# EAGLE board GPSClock (EAGLE 6.5.0)
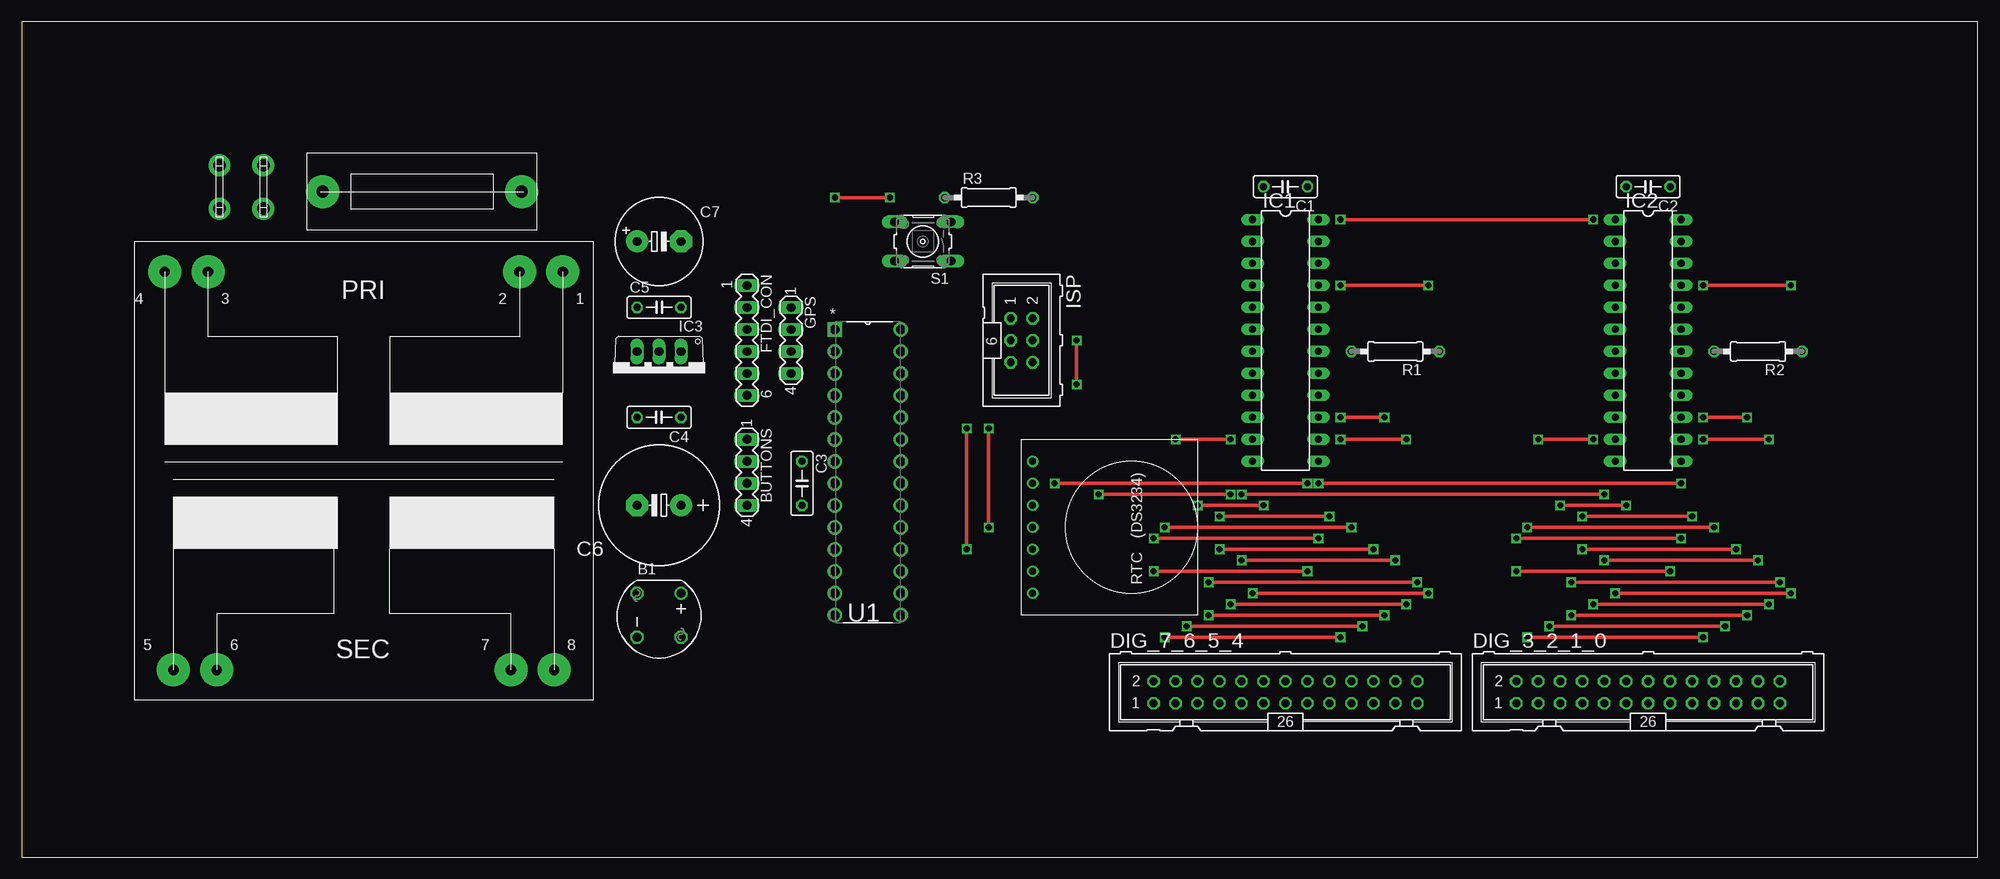
[diagram p0: board, top side]
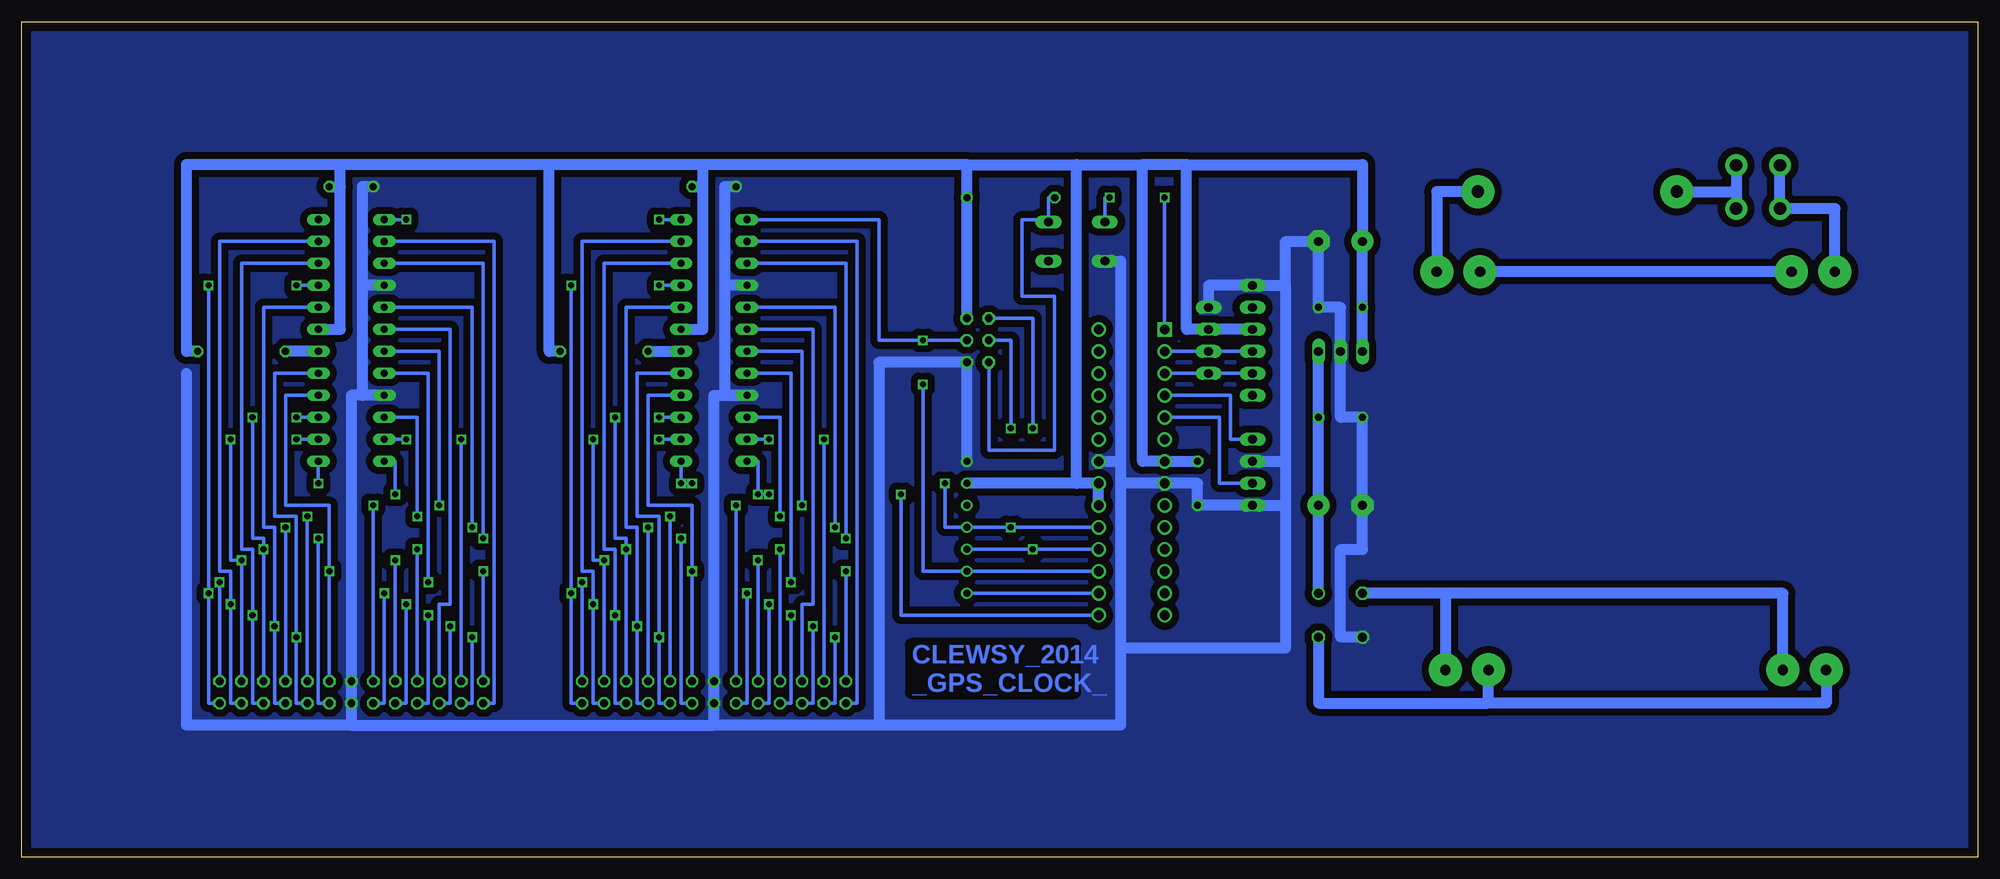
[diagram p1: board, bottom side, seen from below]

Size 226.07 x 96.52 mm. Coordinates in mm from the lower left corner, seen from the top.
Outline: 0,0 226.06,0 226.06,96.52 0,96.52 0,0
Copper layers (1*16): Top 0.035mm / dielectric 1.5mm / Bottom 0.035mm
Design rules "default *": minimum track width 10mil, minimum drill 24mil, track to track 8mil, track to pad 8mil, pad to pad 8mil, via to via 8mil, smd to smd 8mil, copper to edge 40mil, drill to drill 8mil, minimum pad ring 10mil, minimum via ring 8mil, stop-mask expansion 4mil, vias tented up to drill 0mil, thermal gap 10mil

## Footprints (pad centres in the part's own frame; a part is rotated, then mirrored left to right if it is on the bottom)
RB1A = drill 1.016: + -2.54,2.54 | drill 1.016 octagon: - 2.54,-2.54; AC1 2.54,2.54; AC2 -2.54,-2.54
MA04-1 = drill 1.016 long: 1 -3.81,0; 2 -1.27,0; 3 1.27,0; 4 3.81,0
C050-025X075 = drill 0.813 octagon: 1 -2.54,0; 2 2.54,0
E5-13 = drill 1.016 pad 2.54: + -2.54,0 | drill 1.016 pad 2.54 octagon: - 2.54,0
E5-10,5 = drill 1.016 pad 2.54: + -2.54,0 | drill 1.016 pad 2.54 octagon: - 2.54,0
ML26 = drill 0.914 octagon: 1 -15.24,-1.27; 2 -15.24,1.27; 3 -12.7,-1.27; 4 -12.7,1.27; 5 -10.16,-1.27; 6 -10.16,1.27; 7 -7.62,-1.27; 8 -7.62,1.27; 9 -5.08,-1.27; 10 -5.08,1.27; 11 -2.54,-1.27; 12 -2.54,1.27; 13 0,-1.27; 14 0,1.27; 15 2.54,-1.27; 16 2.54,1.27; 17 5.08,-1.27; 18 5.08,1.27; 19 7.62,-1.27; 20 7.62,1.27; 21 10.16,-1.27; 22 10.16,1.27; 23 12.7,-1.27; 24 12.7,1.27; 25 15.24,-1.27; 26 15.24,1.27
MA06-1 = drill 1.016 long: 1 -6.35,0; 2 -3.81,0; 3 -1.27,0; 4 1.27,0; 5 3.81,0; 6 6.35,0
DIL24-3 = drill 0.813 long: 1 -13.97,-3.81; 2 -11.43,-3.81; 3 -8.89,-3.81; 4 -6.35,-3.81; 5 -3.81,-3.81; 6 -1.27,-3.81; 7 1.27,-3.81; 8 3.81,-3.81; 9 6.35,-3.81; 10 8.89,-3.81; 11 11.43,-3.81; 12 13.97,-3.81; 13 13.97,3.81; 14 11.43,3.81; 15 8.89,3.81; 16 6.35,3.81; 17 3.81,3.81; 18 1.27,3.81; 19 -1.27,3.81; 20 -3.81,3.81; 21 -6.35,3.81; 22 -8.89,3.81; 23 -11.43,3.81; 24 -13.97,3.81
TO220V = drill 1.016 long: 1 -2.54,-2.54; 2 0,-2.54; 3 2.54,-2.54
ML6 = drill 0.914 octagon: 1 -2.54,-1.27; 2 -2.54,1.27; 3 0,-1.27; 4 0,1.27; 5 2.54,-1.27; 6 2.54,1.27
0207/10 = drill 0.813 octagon: 1 -5.08,0; 2 5.08,0
B3F-10XX = drill 1.016 long: 1 -3.251,2.261; 2 3.251,2.261; 3 -3.251,-2.261; 4 3.251,-2.261
DIP254P762X457-28 = drill 1.118 square: 1 -7.62,33.02 | drill 1.118: 2 -7.62,30.48; 3 -7.62,27.94; 4 -7.62,25.4; 5 -7.62,22.86; 6 -7.62,20.32; 7 -7.62,17.78; 8 -7.62,15.24; 9 -7.62,12.7; 10 -7.62,10.16; 11 -7.62,7.62; 12 -7.62,5.08; 13 -7.62,2.54; 14 -7.62,0; 15 0,0; 16 0,2.54; 17 0,5.08; 18 0,7.62; 19 0,10.16; 20 0,12.7; 21 0,15.24; 22 0,17.78; 23 0,20.32; 24 0,22.86; 25 0,25.4; 26 0,27.94; 27 0,30.48; 28 0,33.02
TRAFO_M4312 = drill 1.2 pad 3.81: P1 3.5,3.5; P2 8.5,3.5; P3 44.5,3.5; P4 49.5,3.5; P5 48.5,49.5; P6 43.5,49.5; P7 9.5,49.5; P8 4.5,49.5
SPADE_PCB = drill 1.4 pad 2.54: P$1 0,0; P$2 5,0
FUSE_HOLDER = drill 1.4 pad 3.81: P$1 1.75,4.5; P$2 24.75,4.5
RTC = drill 0.8: P1 2.54,1.27; P2 5.08,1.27; P3 7.62,1.27; P4 10.16,1.27; P5 12.7,1.27; P6 15.24,1.27; P7 17.78,1.27

## Placement (x,y rotation side)
B1  [RB1A]  73.66,27.94 270 top
BUTTONS  [MA04-1]  83.82,44.45 270 top
C1  [C050-025X075]  146.05,77.47 180 top
C2  [C050-025X075]  187.96,77.47 180 top
C3  [C050-025X075]  90.17,43.18 270 top
C4  [C050-025X075]  73.66,50.8 180 top
C5  [C050-025X075]  73.66,63.5 0 top
C6  [E5-13]  73.66,40.64 180 top
C7  [E5-10,5]  73.66,71.12 0 top
DIG_3_2_1_0  [ML26]  187.96,19.05 0 top
DIG_7_6_5_4  [ML26]  146.05,19.05 0 top
FTDI_CON  [MA06-1]  83.82,59.69 270 top
GPS  [MA04-1]  88.9,59.69 270 top
IC1  MAX7219CNG  [DIL24-3]  146.05,59.69 270 top
IC2  MAX7219CNG  [DIL24-3]  187.96,59.69 270 top
IC3  7805TV  [TO220V]  73.66,55.88 180 top
ISP  [ML6]  115.57,59.69 270 top
R1  [0207/10]  158.75,58.42 180 top
R2  [0207/10]  200.66,58.42 180 top
R3  [0207/10]  111.76,76.2 0 top
S1  [B3F-10XX]  104.14,71.12 180 top
U1  ATMEGA328P-PU  [DIP254P762X457-28]  101.6,27.94 0 top
U$1  TRAFO_M4312  [TRAFO_M4312]  66.04,71.12 180 top
U$2  SPADE_PCB  [SPADE_PCB]  22.86,74.93 90 top
U$3  SPADE_PCB  [SPADE_PCB]  27.94,74.93 90 top
U$4  FUSE_HOLDER  [FUSE_HOLDER]  33.02,72.39 0 top
U$5  RTC  [RTC]  115.57,48.26 270 top

## Library data of the parts
B1 = rectifier
BUTTONS FTDI_CON GPS = con-lstb; OC_FARNELL: unknown; OC_NEWARK: unknown
C1-C7 R1-R3 = rcl
DIG_3_2_1_0 DIG_7_6_5_4 ISP = con-harting-ml; OC_FARNELL: unknown; OC_NEWARK: unknown
IC1 IC2 = maxim; MF: MAXIM; MPN: MAX7219CNG; OC_FARNELL: 1523914; OC_NEWARK: 34C4018
IC3 = linear
S1 = switch-omron; MPN: B3F-1000; OC_FARNELL: 176432; OC_NEWARK: 36M3542
U1 = Atmel_By_element14_Batch_1-00; MPN: ATMEGA328P-PU; OC_FARNELL: 1715487; OC_NEWARK: 15R0268; PACKAGE: PDIP-28; SUPPLIER: Atmel
U$1 = Trafo_M4312
U$2 U$3 = Spade_PCB
U$4 = FUSE_HOLDER
U$5 = RTC

## Nets
GND: B1.- BUTTONS.2 BUTTONS.4 C1.2 C2.2 C3.2 C4.2 C5.2 C6.- C7.- DIG_3_2_1_0.13 DIG_3_2_1_0.14 DIG_7_6_5_4.13 DIG_7_6_5_4.14 FTDI_CON.1 GPS.1 IC1.4 IC1.9 IC2.4 IC2.9 IC3.2 ISP.6 S1.2 U1.8 U1.22 U$5.P1
N$1: FTDI_CON.4 GPS.3 U1.2
N$2: FTDI_CON.5 GPS.4 U1.3
N$3: IC1.13 IC2.13 ISP.3 U1.19 U$5.P4
N$4: ISP.1 U1.18 U$5.P5
N$5: IC1.1 ISP.4 U1.17 U$5.P6
N$6: U1.16 U$5.P7
N$7: IC1.12 IC2.12 U1.15
N$8: B1.AC1 U$1.P5 U$1.P7
N$9: IC1.18 R1.2
N$10: IC2.18 R2.2
N$11: IC1.24 IC2.1
N$12: DIG_3_2_1_0.1 IC2.2
N$13: DIG_3_2_1_0.3 DIG_3_2_1_0.17 IC2.17
N$14: DIG_3_2_1_0.5 DIG_3_2_1_0.19 IC2.20
N$15: DIG_3_2_1_0.7 DIG_3_2_1_0.21 IC2.22
N$16: DIG_3_2_1_0.9 DIG_3_2_1_0.23 IC2.23
N$17: DIG_3_2_1_0.11 DIG_3_2_1_0.25 IC2.21
N$18: DIG_3_2_1_0.15 IC2.3
N$19: DIG_3_2_1_0.2 DIG_3_2_1_0.16 IC2.16
N$20: DIG_3_2_1_0.4 IC2.11
N$21: DIG_3_2_1_0.6 IC2.6
N$22: DIG_3_2_1_0.8 DIG_3_2_1_0.22 IC2.15
N$23: DIG_3_2_1_0.10 DIG_3_2_1_0.24 IC2.14
N$24: DIG_3_2_1_0.12 IC2.7
N$25: DIG_3_2_1_0.18 IC2.10
N$26: DIG_3_2_1_0.20 IC2.5
N$27: DIG_3_2_1_0.26 IC2.8
N$28: DIG_7_6_5_4.1 IC1.2
N$29: DIG_7_6_5_4.3 DIG_7_6_5_4.17 IC1.17
N$30: DIG_7_6_5_4.5 DIG_7_6_5_4.19 IC1.20
N$31: DIG_7_6_5_4.7 DIG_7_6_5_4.21 IC1.22
N$32: DIG_7_6_5_4.9 DIG_7_6_5_4.23 IC1.23
N$33: DIG_7_6_5_4.11 DIG_7_6_5_4.25 IC1.21
N$34: DIG_7_6_5_4.15 IC1.3
N$35: DIG_7_6_5_4.2 DIG_7_6_5_4.16 IC1.16
N$36: DIG_7_6_5_4.4 IC1.11
N$37: DIG_7_6_5_4.6 IC1.6
N$38: DIG_7_6_5_4.8 DIG_7_6_5_4.22 IC1.15
N$39: DIG_7_6_5_4.10 DIG_7_6_5_4.24 IC1.14
N$40: DIG_7_6_5_4.12 IC1.7
N$41: DIG_7_6_5_4.18 IC1.10
N$42: DIG_7_6_5_4.20 IC1.5
N$43: DIG_7_6_5_4.26 IC1.8
N$44: U$3.P$1 U$3.P$2 U$4.P$1
N$45: ISP.5 R3.1 S1.3
N$46: BUTTONS.1 U1.4
N$47: BUTTONS.3 U1.5
N$48: S1.4 U1.1
N$49: U$1.P2 U$1.P3
N$50: B1.+ C4.1 C6.+ IC3.1
N$51: U$1.P1 U$4.P$2
N$52: U$1.P4 U$2.P$1 U$2.P$2
TRAN: B1.AC2 U$1.P6 U$1.P8
VCC: C1.1 C2.1 C3.1 C5.1 C7.+ FTDI_CON.3 GPS.2 IC1.19 IC2.19 IC3.3 ISP.2 R1.1 R2.1 R3.2 U1.7 U1.20 U1.21 U$5.P2

## Tracks (layer width: path | path; a pad name or v marks a point on that pad's centre or on a via)
GND
  Bottom 1.27: 144.78,66.04 144.78,53.34 IC1.9 146.05,53.34 DIG_7_6_5_4.14 DIG_7_6_5_4.13 146.05,15.24 | IC1.4 144.78,66.04 | 144.78,66.04 144.78,77.47 C1.2 | IC2.4 186.69,66.04 | 186.69,66.04 186.69,53.34 | 186.69,53.34 187.96,53.34 DIG_3_2_1_0.14 DIG_3_2_1_0.13 187.96,15.24 | 187.96,15.24 146.05,15.24 | 186.69,66.04 186.69,77.47 C2.2 | IC2.9 186.69,53.34 | U1.22 99.06,45.72 | 99.06,45.72 99.06,43.18 | 99.06,43.18 99.06,24.13 | 99.06,24.13 99.06,15.24 127,15.24 | 99.06,43.18 U1.8 90.17,43.18 C3.2 BUTTONS.4 80.01,40.64 | U$5.P1 ISP.6 127,57.15 127,15.24 | 127,15.24 146.05,15.24 | S1.2 99.06,68.86 99.06,45.72 | 80.01,66.04 FTDI_CON.1 88.9,66.04 GPS.1 | 80.01,66.04 80.01,45.72 | 80.01,45.72 80.01,40.64 | BUTTONS.2 80.01,45.72 | B1.- 73.66,25.4 73.66,35.56 71.12,35.56 C6.- C4.2 73.66,50.8 IC3.2 73.66,63.5 C5.2 C7.- 80.01,71.12 80.01,66.04 | 187.96,15.24 207.01,15.24 207.01,55.88 | 80.01,40.64 80.01,24.13 99.06,24.13
  pour Bottom (isolate 0.813, no thermals): 1.27,95.25 1.27,1.27 224.79,1.27 224.79,95.25
N$1
  Bottom 0.406: U1.2 GPS.3 FTDI_CON.4
N$2
  Bottom 0.406: U1.3 GPS.4 FTDI_CON.5
N$3  (via drill 0.7)
  Top 0.406: v149.86,43.18 v191.77,43.18 | v148.59,43.18 v119.38,43.18 | v111.76,49.53 v111.76,38.1
  Bottom 0.406: IC2.13 v191.77,43.18 | IC1.13 v149.86,43.18 v148.59,43.18 | U1.19 v111.76,38.1 U$5.P4 119.38,38.1 v119.38,43.18 | ISP.3 111.76,59.69 v111.76,49.53
N$4  (via drill 0.7)
  Top 0.406: v109.22,49.53 v109.22,35.56
  Bottom 0.406: U1.18 v109.22,35.56 U$5.P5 | ISP.1 109.22,62.23 v109.22,49.53
N$5  (via drill 0.7)
  Top 0.406: v121.92,59.69 v121.92,54.61
  Bottom 0.406: U1.17 U$5.P6 121.92,33.02 v121.92,54.61 | IC1.1 127,73.66 127,59.69 v121.92,59.69 ISP.4
N$6
  Bottom 0.406: U1.16 U$5.P7
N$7  (via drill 0.7)
  Top 0.406: v139.7,41.91 v124.46,41.91 | v182.88,41.91 v140.97,41.91
  Bottom 0.406: IC2.12 182.88,45.72 v182.88,41.91 | IC1.12 140.97,45.72 v140.97,41.91 v139.7,41.91 | v124.46,41.91 124.46,27.94 U1.15
N$8
  Bottom 1.27: B1.AC1 76.2,17.78 56.54,17.78 | 56.54,17.78 U$1.P7 | U$1.P5 17.54,17.78 56.54,17.78
N$9
  Bottom 1.27: R1.2 IC1.18
N$10
  Bottom 1.27: IC2.18 R2.2
N$11  (via drill 0.7)
  Top 0.406: v152.4,73.66 v181.61,73.66
  Bottom 0.406: IC1.24 v152.4,73.66 | v181.61,73.66 IC2.1
N$12
  Bottom 0.406: DIG_3_2_1_0.1 171.45,17.78 171.45,71.12 IC2.2
N$13  (via drill 0.7)
  Top 0.406: v194.31,25.4 v173.99,25.4
  Bottom 0.406: DIG_3_2_1_0.3 173.99,17.78 v173.99,25.4 | DIG_3_2_1_0.17 194.31,17.78 v194.31,25.4 194.31,39.37 196.85,39.37 196.85,55.88 IC2.17
N$14  (via drill 0.7)
  Top 0.406: v196.85,26.67 v176.53,26.67
  Bottom 0.406: DIG_3_2_1_0.5 176.53,17.78 v176.53,26.67 | DIG_3_2_1_0.19 196.85,17.78 v196.85,26.67 196.85,38.1 198.12,38.1 198.12,63.5 IC2.20
N$15  (via drill 0.7)
  Top 0.406: v199.39,27.94 v179.07,27.94
  Bottom 0.406: DIG_3_2_1_0.7 179.07,17.78 v179.07,27.94 | DIG_3_2_1_0.21 199.39,17.78 v199.39,27.94 199.39,35.56 200.66,35.56 200.66,68.58 IC2.22
N$16  (via drill 0.7)
  Top 0.406: v181.61,29.21 v201.93,29.21
  Bottom 0.406: DIG_3_2_1_0.23 201.93,17.78 v201.93,29.21 201.93,33.02 203.2,33.02 203.2,71.12 IC2.23 | DIG_3_2_1_0.9 181.61,17.78 v181.61,29.21
N$17  (via drill 0.7)
  Top 0.406: v204.47,30.48 v184.15,30.48 | v194.31,66.04 v204.47,66.04
  Bottom 0.406: DIG_3_2_1_0.25 204.47,17.78 v204.47,30.48 v204.47,66.04 | v184.15,30.48 184.15,17.78 DIG_3_2_1_0.11 | IC2.21 v194.31,66.04
N$18  (via drill 0.7)
  Top 0.406: v172.72,36.83 v191.77,36.83
  Bottom 0.406: DIG_3_2_1_0.15 191.77,17.78 v191.77,36.83 | IC2.3 172.72,68.58 v172.72,36.83
N$19  (via drill 0.7)
  Top 0.406: v172.72,33.02 v190.5,33.02
  Bottom 0.406: 172.72,24.13 DIG_3_2_1_0.2 v172.72,33.02 | DIG_3_2_1_0.16 v190.5,33.02 190.5,40.64 195.58,40.64 195.58,53.34 IC2.16
N$20  (via drill 0.7)
  Top 0.406: v175.26,48.26 v181.61,48.26
  Bottom 0.406: DIG_3_2_1_0.4 v175.26,48.26 | v181.61,48.26 IC2.11
N$21
  Bottom 0.406: IC2.6 176.53,60.96 176.53,29.21 177.8,29.21 DIG_3_2_1_0.6
N$22  (via drill 0.7)
  Top 0.406: v199.39,50.8 v194.31,50.8 | v180.34,35.56 v198.12,35.56
  Bottom 0.406: DIG_3_2_1_0.22 v198.12,35.56 | v198.12,35.56 198.12,36.83 199.39,36.83 v199.39,50.8 | v194.31,50.8 IC2.15 | DIG_3_2_1_0.8 v180.34,35.56 | v198.12,35.56 198.12,34.29
N$23  (via drill 0.7)
  Top 0.406: v201.93,48.26 v194.31,48.26 | v182.88,34.29 v200.66,34.29
  Bottom 0.406: DIG_3_2_1_0.24 v200.66,34.29 201.93,34.29 v201.93,48.26 | v194.31,48.26 IC2.14 | DIG_3_2_1_0.10 v182.88,34.29
N$24  (via drill 0.7)
  Top 0.406: v185.42,40.64 v177.8,40.64
  Bottom 0.406: DIG_3_2_1_0.12 v185.42,40.64 | IC2.7 177.8,58.42 v177.8,40.64
N$25  (via drill 0.7)
  Top 0.406: v180.34,39.37 v193.04,39.37
  Bottom 0.406: IC2.10 180.34,50.8 v180.34,39.37 | v193.04,39.37 DIG_3_2_1_0.18
N$26  (via drill 0.7)
  Top 0.406: v173.99,38.1 v195.58,38.1
  Bottom 0.406: IC2.5 173.99,63.5 v173.99,38.1 | v195.58,38.1 DIG_3_2_1_0.20
N$27  (via drill 0.7)
  Top 0.406: v179.07,31.75 v203.2,31.75
  Bottom 0.406: IC2.8 179.07,55.88 v179.07,31.75 | v203.2,31.75 DIG_3_2_1_0.26
N$28
  Bottom 0.406: IC1.2 129.54,71.12 129.54,17.78 DIG_7_6_5_4.1
N$29  (via drill 0.7)
  Top 0.406: v132.08,25.4 v152.4,25.4
  Bottom 0.406: DIG_7_6_5_4.3 132.08,17.78 v132.08,25.4 | DIG_7_6_5_4.17 152.4,17.78 v152.4,25.4 152.4,39.37 154.94,39.37 154.94,55.88 IC1.17
N$30  (via drill 0.7)
  Top 0.406: v134.62,26.67 v154.94,26.67
  Bottom 0.406: DIG_7_6_5_4.5 134.62,17.78 v134.62,26.67 | DIG_7_6_5_4.19 154.94,17.78 v154.94,26.67 154.94,38.1 156.21,38.1 156.21,63.5 IC1.20
N$31  (via drill 0.7)
  Top 0.406: v137.16,27.94 v157.48,27.94
  Bottom 0.406: DIG_7_6_5_4.7 137.16,17.78 v137.16,27.94 | DIG_7_6_5_4.21 157.48,17.78 v157.48,27.94 157.48,35.56 158.75,35.56 158.75,68.58 IC1.22
N$32  (via drill 0.7)
  Top 0.406: v139.7,29.21 v160.02,29.21
  Bottom 0.406: DIG_7_6_5_4.9 139.7,17.78 v139.7,29.21 | DIG_7_6_5_4.23 160.02,17.78 v160.02,29.21 160.02,33.02 161.29,33.02 161.29,71.12 IC1.23
N$33  (via drill 0.7)
  Top 0.406: v142.24,30.48 v162.56,30.48 | v152.4,66.04 v162.56,66.04
  Bottom 0.406: DIG_7_6_5_4.11 142.24,17.78 v142.24,30.48 | DIG_7_6_5_4.25 162.56,17.78 v162.56,30.48 v162.56,66.04 | IC1.21 v152.4,66.04
N$34  (via drill 0.7)
  Top 0.406: v149.86,36.83 v130.81,36.83
  Bottom 0.406: DIG_7_6_5_4.15 149.86,17.78 v149.86,36.83 | v130.81,36.83 130.81,68.58 IC1.3
N$35  (via drill 0.7)
  Top 0.406: v130.81,33.02 v148.59,33.02
  Bottom 0.406: DIG_7_6_5_4.2 v130.81,33.02 | v148.59,33.02 DIG_7_6_5_4.16 148.59,40.64 153.67,40.64 153.67,53.34 IC1.16
N$36  (via drill 0.7)
  Top 0.406: v133.35,48.26 v139.7,48.26
  Bottom 0.406: DIG_7_6_5_4.4 v133.35,48.26 | v139.7,48.26 IC1.11
N$37
  Bottom 0.406: DIG_7_6_5_4.6 135.89,29.21 134.62,29.21 134.62,60.96 IC1.6
N$38  (via drill 0.7)
  Top 0.406: v138.43,35.56 v156.21,35.56 | v152.4,50.8 v157.48,50.8
  Bottom 0.406: DIG_7_6_5_4.8 v138.43,35.56 | DIG_7_6_5_4.22 v156.21,35.56 156.21,36.83 157.48,36.83 v157.48,50.8 | IC1.15 v152.4,50.8
N$39  (via drill 0.7)
  Top 0.406: v140.97,34.29 v158.75,34.29 | v152.4,48.26 v160.02,48.26
  Bottom 0.406: DIG_7_6_5_4.10 v140.97,34.29 | DIG_7_6_5_4.24 v158.75,34.29 160.02,34.29 v160.02,48.26 | IC1.14 v152.4,48.26
N$40  (via drill 0.7)
  Top 0.406: v143.51,40.64 v135.89,40.64
  Bottom 0.406: DIG_7_6_5_4.12 v143.51,40.64 | v135.89,40.64 135.89,58.42 IC1.7
N$41  (via drill 0.7)
  Top 0.406: v151.13,39.37 v138.43,39.37
  Bottom 0.406: DIG_7_6_5_4.18 v151.13,39.37 | v138.43,39.37 138.43,50.8 IC1.10
N$42  (via drill 0.7)
  Top 0.406: v153.67,38.1 v132.08,38.1
  Bottom 0.406: DIG_7_6_5_4.20 v153.67,38.1 | v132.08,38.1 132.08,63.5 IC1.5
N$43  (via drill 0.7)
  Top 0.406: v161.29,31.75 v137.16,31.75
  Bottom 0.406: DIG_7_6_5_4.26 v161.29,31.75 | v137.16,31.75 137.16,55.88 IC1.8
N$44
  Bottom 1.27: U$3.P$2 27.94,76.89 | U$4.P$1 27.94,76.89 | 27.94,76.89 U$3.P$1
N$45
  Bottom 0.406: ISP.5 114.3,46.99 106.68,46.99 106.68,64.77 110.49,64.77 110.49,73.66 107.39,73.66 S1.3 107.39,76.2 R3.1
N$46
  Bottom 0.406: BUTTONS.1 86.36,48.26 86.36,53.34 U1.4
N$47
  Bottom 0.406: BUTTONS.3 87.63,43.18 87.63,50.8 U1.5
N$48  (via drill 0.7)
  Top 0.406: v93.98,76.2 v100.33,76.2
  Bottom 0.406: U1.1 v93.98,76.2 | v100.33,76.2 100.89,76.2 S1.4
N$49
  Bottom 1.27: U$1.P3 U$1.P2
N$50
  Bottom 1.27: B1.+ C6.+ C4.1 IC3.1
N$51
  Bottom 1.27: U$4.P$2 62.54,76.89 U$1.P1
N$52
  Bottom 1.27: U$1.P4 16.51,67.62 16.51,74.93 U$2.P$1 U$2.P$2
TRAN
  Bottom 1.27: 61.54,30.48 B1.AC2 | U$1.P6 22.54,30.48 61.54,30.48 | 61.54,30.48 U$1.P8
VCC
  Bottom 0.406: U1.21 104.14,43.18
  Bottom 1.27: R2.1 207.01,58.42 207.01,80.01 189.23,80.01 | IC1.19 147.32,60.96 147.32,77.47 | 147.32,77.47 147.32,80.01 | 147.32,80.01 165.1,80.01 | 165.1,80.01 189.23,80.01 | IC2.19 189.23,60.96 189.23,77.47 | 189.23,77.47 189.23,80.01 | R1.1 165.1,58.42 165.1,80.01 | ISP.2 R3.2 116.84,80.01 | 116.84,80.01 147.32,80.01 | U$5.P2 U1.21 U1.20 | 104.14,43.18 104.14,80.01 | 96.52,80.01 96.52,45.72 U1.7 C3.1 | 116.84,80.01 104.14,80.01 | 104.14,80.01 96.52,80.01 | 91.44,80.01 91.44,60.96 GPS.2 FTDI_CON.3 | 91.44,80.01 96.52,80.01 | C1.1 147.32,77.47 | C2.1 189.23,77.47 | IC3.3 C5.1 C7.+ 71.12,80.01 91.44,80.01

## Text on the board
Bottom: CLEWSY_2014 / _GPS_CLOCK_